# Altium PCB PCB1.PcbDoc (part 2 of 2)
Units mm, origin at the board's own origin, x right, y up, seen from the top; angles counter-clockwise.
Board outline 100 x 70 mm, 4 copper layers (Top Layer, Int1 (GND), Int2 (PWR), Bottom Layer), stack 1.334 mm thick; 109 components, 77 nets, 370 pads, 170 vias.
Unrouted connection lines stored in the file: 2.
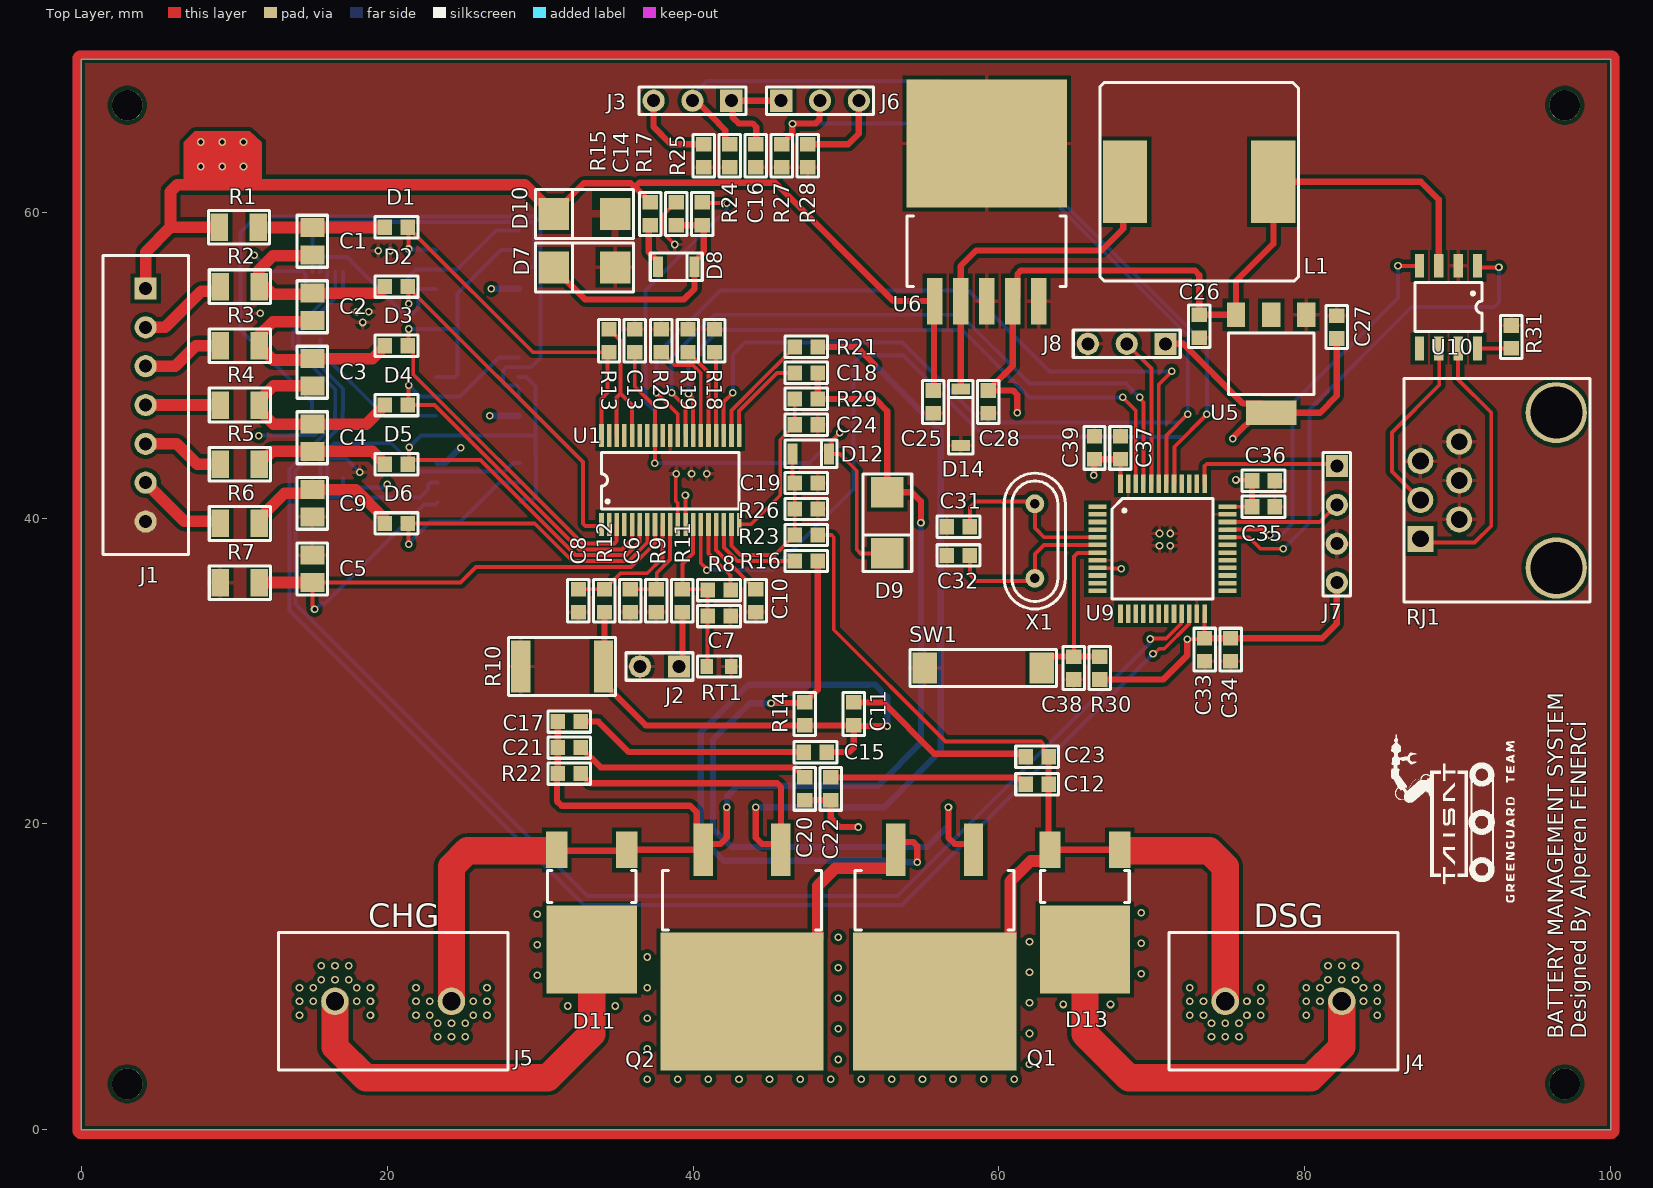
[diagram p0: Top Layer view]

## Via types
v1: diameter 0.5/0.5 (per signal layer), hole 0.3, Top Layer to Bottom Layer, 170 vias

## Nets (pads, with @x,y where several pads share a name; then routed paths per layer and width w, separated by ;. In a path a pad name is that pad's centre, name@x,y a point inside that pad or via, vN(x,y) a via of type N, cw(c..) or ccw(c..) an arc to the next point about the centre after c; other vN are vias at no path point) (continued)
CAN_L: (continued)
  Top Layer w0.254: RJ1.2 85.7,43.05 85.7,45.6 88.793,48.693 88.793,51.072 U10.6
CAN_RX: U9.32 U10.1 | length 32.8
  Top Layer w0.254: U9.32 76.35,38.75 77.1,38 v1(78.6,38) ; U10.1 91.405,56.4 v1(92.7,56.4)
  Bottom Layer w0.254: v1(78.6,38) 80.3,39.7 80.3,47.1 87,53.8 92.4,53.8 92.7,54.1 v1(92.7,56.4)
CAN_TX: U9.33 U10.4 | length 25.8
  Top Layer w0.254: U9.33 77.283,39.25 77.633,38.9 v1(77.7,38.9) ; v1(86.1,56.5) U10.4
  Bottom Layer w0.254: v1(77.7,38.9) 78.461,38.9 79.2,39.639 79.2,47.5 86.1,54.4 v1(86.1,56.5)
CCAP: C18.1 U1.20 | length 6.3
  Top Layer w0.254: U1.20@43,45.4 43,47 45.5,49.5 C18.1
CELL1: J1.6 R6.1 | length 6
  Top Layer w0.762: J1.6 6.72,39.8 8.938,39.8 R6.1
CELL2: J1.5 R5.1 | length 5.4
  Top Layer w0.762: J1.5 6.24,44.86 7.573,43.527 R5.1
CELL3: J1.4 R4.1 | length 4.9
  Top Layer w0.762: J1.4 R4.1
CELL4: J1.3 R3.1 | length 5.4
  Top Layer w0.762: J1.3 6.14,49.94 7.473,51.273 R3.1
CELL5: J1.2 R2.1 | length 6.1
  Top Layer w0.762: J1.2 5.48,52.48 7.832,54.832 8.891,54.832 9.085,55.026 R2.1
CELL6: C20.1 C22.1 C25.1 D10.1 D11.2 D13.2 J1.1 J4.2 J5.1 R1.1 R15.2 U2.8 U3.8 U4.8 U6.1 | length 137.9
  Top Layer w0.406: D10.1 30.9,59.95 32.85,61.9 35.925,61.9 36.242,61.583 ; R15.2 36.255,61.595 36.255,61.694 36.493,61.932 45.368,61.932 53.105,54.195 U6.1 55.748,54.147 55.748,48.398 C25.1 ; C20.1 C22.1 49,20.4 49.6,19.8 v1(50.8,19.8)
  Top Layer w0.762: J1.1 4.2,57.4 5.82,59.02 ; R1.1 5.82,59.02 ; D10.1@30.9,59.95 30.281,60.569 30.231,60.569 29,61.8 6.266,61.8 5.82,61.354 5.82,59.02
  Top Layer w1.778: J5.1 16.584,8.396 16.584,5.416 18.6,3.4 30.5,3.4 33.375,6.275 D11.2 ; D13.2 65.625,6.275 68.5,3.4 80.4,3.4 82.416,5.416 82.416,8.396 J4.2
  Bottom Layer w0.406: U4.8 23.775,43.605 24.752,44.582 24.782,44.582 v1(24.8,44.6) ; v1(26.7,46.7) 26.703,46.697 28.597,46.697 U3.8 ; v1(26.8,55) 26.802,54.997 28.597,54.997 U2.8
  other v1: 7.8,63 9.2,63 10.6,63 7.8,64.6 9.2,64.6 10.6,64.6
CHG: R21.2 U1.21 | length 7.5
  Top Layer w0.254: U1.21@42.5,45.4 42.5,47.039 45.342,49.881 45.356,49.881 46.65,51.175 R21.2
CHG_RAIL: C17.1 C18.2 C21.2 D9.2 D11.1 D11.3 J5.2 Q2.2 R22.1 R29.1 | length 91.7
  Top Layer w0.406: D11.3 31.15,18.255 35.6,18.255 D11.1 Q2.2 ; C17.1 C21.2 R22.1 31.1,23.25 31.1,21.5 31.4,21.2 39.8,21.2 40.235,20.765 40.235,18.74 Q2.2 ; v1(42.2,21.1) 42.2,19.1 41.8,18.7 41.046,18.7 Q2.2 ; C18.2 R29.1 51.9,47.8 52.7,47 D9.2 54.3,41.7 54.9,41.1 v1(54.9,39.7)
  Top Layer w1.778: J5.2 24.2,17.213 25.242,18.255 D11.3@30.901,18.255
  Bottom Layer w0.406: v1(42.2,21.1) 42.218,21.118 42.218,21.818 42.9,22.5 52.1,22.5 54.9,25.3 v1(54.9,39.7)
CHGST: J3.2 R24.2 U1.14 U9.41 | length 104.8
  Top Layer w0.254: U1.14@40.5,39.6 40.5,37.067 40.9,36.667 v1(40.9,36.6) ; U9.41 71.473,42.273 71.473,44.673 v1(73.6,46.8)
  Top Layer w0.406: J3.2 40.2,67.3 41.682,65.818 ; 41.7,65.8 41.7,65.775 42.103,65.371 42.103,64.722 42.375,64.45 R24.2
  Bottom Layer w0.254: J3.2 39.96,67.624 40.548,68.212 40.548,68.248 40.9,68.6 56.228,68.6 73.6,51.228 v1(73.6,46.8) 73.6,46.776 72.124,45.3 59.1,45.3 53.769,50.631 50.98,50.631 50.5,50.151 50.5,41.9 45.2,36.6 v1(40.9,36.6)
CPCKN: C24.1 R29.2 U1.19 | length 10.2
  Top Layer w0.254: U1.19@43,39.6 43.8,39.6 45.7,41.5 45.7,45.125 46.65,46.075 C24.1 R29.2
DCAP: C10.1 U1.16 | length 5.3
  Top Layer w0.254: U1.16@41.5,39.6 41.5,37.925 44.075,35.35 C10.1
DPCKN: C19.1 D12.2 R23.2 R26.2 U1.18 | length 11.7
  Top Layer w0.254: U1.18@42.5,39.6 42.5,38.2 43.1,37.6 45.35,37.6 46.277,38.527 46.302,38.527 46.65,38.875 R23.2 R26.2 C19.1 46.5,42.45 D12.2
DSG: R16.2 U1.17 | length 6.5
  Top Layer w0.254: U1.17@42,39.6 42.023,39.577 42.023,38.077 42.9,37.2 R16.2
DSG_RAIL: C12.1 C23.2 D13.1 D13.3 J4.1 Q1.3 R23.1 | length 65.7
  Top Layer w0.254: R23.1 49.051,38.9 49.2,38.751 49.2,32.7 56.5,25.4 62.753,25.4 62.902,25.251 62.902,24.748 C12.1
  Top Layer w0.406: C12.1 C23.2 63.25,18.404 D13.3 D13.1 D13.1@67.85,18.255
  Top Layer w0.762: Q1.3 56.626,8.4 60.753,12.527 60.753,16.253 62.081,17.581 63.021,17.581 63.34,17.9 D13.3
  Top Layer w1.778: D13.1@68.099,18.255 73.758,18.255 74.8,17.213 J4.1
GND: C5.2 C6.2 C7.2 C8.2 C9.2 C10.2 C13.2 C14.2 C16.2 C19.2 C24.2 C25.2 C26.2 C27.2 C28.2 C29.2 C30.2 C31.2 C32.2 C33.2 C34.2 C35.2 C36.2 C37.2 C38.2 C39.2 D7.2 D10.2 D14.2 J1.7 J2.2 J7.3 J8.3 R7.1 R9.1 R10.1 R18.1 R19.1 R20.1 R24.1 R25.1 R26.1 R27.1 R28.1 R31.1 RJ1.3 RJ1.4 RJ1.5 RJ1.6 RT1.2 SW1.1 U1.11 U1.29 U2.4 U3.4 U4.4 U5.1 U6.3 U6.5 U7.3 U8.1 U8.3 U9.8 U9.23 U9.35 U9.47 U10.2 | length 10.5
  Top Layer w0.254: v1(38.8,57.9) 38,58.7 38,59.775 38.875,60.65 C14.2 ; v1(38.9,42.9) 38.869,42.869 38.869,41.131 39,41 U1.11@39,39.6
  Bottom Layer w0.254: U7.3 16.1,43.7 16.3,43.9 17.3,43.9 v1(18.2,43)
  other v1: 70.5,38.2 71.2,38.2 70.5,39 71.2,39 39.9,42.9 40.9,42.9 18.4,52.8 11.7,53.4 18,53.5 18.8,53.5 19.4,57.5 20.2,57.5
HIGH_DSG_RAIL: C11.1 C15.1 Q1.2 Q2.3 R10.2 R12.1 R14.1 | length 84.7
  Top Layer w0.406: R12.1 34.2,30.37 R10.2 34.13,29.225 36.905,26.45 R14.1 C11.1 ; C15.1 50.2,24.7 50.5,25 C11.1 ; v1(52.7,26.4) 52.682,26.418 50.532,26.418 C11.1 ; Q1.2 53.26,18.353 Q1.2@53.685,18.778 ; Q1.2@53.685,18.822 54.4,18.822 54.662,18.559 54.662,17.5 v1(54.665,17.497)
  Top Layer w0.762: Q2.3 44.026,8.4 48.153,12.527 48.153,15.953 49.3,17.1 53.013,17.1 53.26,17.347 Q1.2
  Bottom Layer w0.406: v1(52.7,26.4) 52.7,28.3 51.868,29.132 51.532,29.132 51.5,29.1 43.6,29.1 40.5,26 40.5,19.1 42,17.6 53.603,17.6 53.706,17.497 v1(54.665,17.497)
NetC1_1: C1.1 D1.2 R1.2 | length 8.3
  Top Layer w0.762: R1.2 11.585,59.01 15.09,59.01 C1.1 15.11,59.01 19.84,59.01 D1.2
NetC1_2: C1.2 C2.1 D2.2 R2.2 | length 13.3
  Top Layer w0.762: C2.1@15.065,54.648 12.527,54.648 11.6,55.575 11.6,56.225 12.527,57.152 C1.2@15.065,57.152 ; C2.1 19.419,54.716 19.731,55.028 19.756,55.028 19.85,55.122 D2.2
NetC2_2: C2.2 C3.1 D3.2 R3.2 | length 13.5
  Top Layer w0.762: C3.1@15.065,50.348 12.527,50.348 11.6,51.275 11.6,51.925 12.527,52.852 C2.2@15.065,52.852 ; C3.1 19.034,50.432 19.85,51.248 D3.2 D3.2@19.85,51.298
NetC3_2: C3.2 C4.1 D4.2 R4.2 | length 13.6
  Top Layer w0.762: C3.2 12.562,48.652 11.635,47.725 R4.2 11.635,47.075 12.562,46.148 C4.1 18.623,46.148 19.85,47.375 D4.2
NetC4_2: C4.2 D5.2 R5.2 | length 9.1
  Top Layer w0.762: R5.2 11.635,43.852 11.829,44.046 12.154,44.046 12.476,44.368 C4.2 19.034,44.368 19.85,43.552 D5.2
NetC9_1: C9.1 D6.2 R6.2 | length 10.4
  Top Layer w0.762: R6.2 11.635,39.978 13.282,41.625 14.861,41.625 C9.1 17.936,41.864 19.756,40.044 19.756,39.747 D6.2
NetC11_2: C11.2 C12.2 | length 12.7
  Top Layer w0.406: C11.2 52.423,27.95 55.773,24.6 61.55,24.6 C12.2
NetC14_1: C14.1 D7.1 D8.1 R17.2 | length 16.5
  Top Layer w0.406: D7.1 30.9,56.35 32.95,54.3 39.4,54.3 40.1,55 40.1,56.8 40.7,57.4 40.7,59.05 R17.2 C14.1
NetC15_2: C15.2 C17.2 | length 15.4
  Top Layer w0.406: C17.2 33.8,26.7 35.8,24.7 C15.2
NetC20_2: C20.2 C21.1 | length 15.5
  Top Layer w0.406: C21.1 33.95,23.7 46.65,23.7 47.003,23.347 47.003,23.322 47.275,23.05 C20.2
NetC22_2: C22.2 C23.1 | length 12.9
  Top Layer w0.406: C22.2@49.025,23.05 61.24,23.05 61.393,22.897 61.478,22.897 61.75,22.625 C23.1
NetD8_2: D8.2 R15.1 | length 2.5
  Top Layer w0.406: R15.1@37.1,59.05 37.1,57.4 D8.2@37.7,56.8
NetD14_1: D14.1 L1.1 U6.2 | length 22.8
  Top Layer w0.406: D14.1 D14.1 57.499,54.194 U6.2 57.498,56.498 58.5,57.5 66.7,57.5 68.128,58.928 68.128,61.878 L1.1
NetJ2_1: J2.1 R11.2 | length 3.6
  Top Layer w0.406: J2.1 39.3,30.53 R11.2
NetJ3_3: J3.3 R25.2 | length 5.5
  Top Layer w0.406: J3.3 37.42,65.58 38.55,64.45 R25.2
NetJ6_3: J6.3 R28.2 | length 5.8
  Top Layer w0.406: R28.2 50.15,64.45 50.84,65.14 J6.3
NetQ1_1: Q1.1 R14.2 R16.1 | length 43.4
  Top Layer w0.406: v1(45.1,27.9) 45.118,27.918 47.268,27.918 R14.2 47.325,27.95 48.15,28.775 R16.1 ; v1(56.7,21.1) 56.7,19.1 57.1,18.7 Q1.1@57.854,18.7
  Bottom Layer w0.406: v1(45.1,27.9) 43.7,27.9 41.3,25.5 41.3,19.7 42.5,18.5 55.3,18.5 56.7,19.9 v1(56.7,21.1)
NetQ2_1: Q2.1 R21.1 R22.2 | length 65.8
  Top Layer w0.406: R22.2 32.65,23.275 32.922,23.003 32.947,23.003 33.29,22.66 45.502,22.66 45.74,22.422 Q2.1 ; v1(44.1,21.1) 44.1,19.1 44.5,18.7 Q2.1@45.254,18.7 ; R21.1 50.7,51.2 51.9,50
  Bottom Layer w0.406: v1(44.1,21.1) 52.5,21.1 56.2,24.8 56.2,45.7 51.9,50
NetR13_2: R13.2 U1.34 U1.36 | length 10.4
  Top Layer w0.254: R13.2 34.525,52.35 35.254,51.621 35.254,48.154 ; U1.36@35,45.4 35,47.9 35.254,48.154 ; U1.34@36,45.4 36,47.408 35.254,48.154
NetR18_2: R18.2 U1.23 | length 5.5
  Top Layer w0.254: R18.2 41.5,50.75 U1.23@41.5,45.4
NetR19_2: R19.2 U1.24 | length 6
  Top Layer w0.254: R19.2 39.687,50.85 41,49.538 U1.24@41,45.4
NetR20_2: R20.2 U1.25 | length 7.2
  Top Layer w0.254: R20.2 37.95,50.85 38.8,50 39.999,50 40.5,49.499 U1.25@40.5,45.4
NetR31_2: R31.2 U10.8 | length 2.2
  Top Layer w0.254: U10.8 R31.2
NetU1_26: U1.26 U9.46 | length 42.1
  Top Layer w0.254: v1@39.7,48.2 v1(39.7,48.133) 40,47.833 U1.26@40,45.4 ; v1(68.1,47.9) 68.95,47.05 U9.46
  Bottom Layer w0.254: v1@39.7,48.2 39.7,50.3 41.7,52.3 57.6,52.3 62,47.9 v1(68.1,47.9)
NetU1_27: U1.27 U9.45 | length 45.2
  Top Layer w0.254: v1(38.6,48.2) 39.5,47.3 U1.27@39.5,45.4 ; v1(69.2,47.9) 69.2,47.833 69.45,47.583 U9.45
  Bottom Layer w0.254: v1(38.6,48.2) 38.6,50.5 41.4,53.3 57.5,53.3 62,48.8 68.3,48.8 v1(69.2,47.9)
NetU1_28: U1.28 U9.43 | length 51.2
  Top Layer w0.254: v1(37.6,48.2) 39,46.8 U1.28@39,45.4 ; U9.43 70.45,48.75 v1(71.3,49.6)
  Bottom Layer w0.254: v1(37.6,48.2) 37.6,50.7 41.8,54.9 58,54.9 63.3,49.6 v1(71.3,49.6)
NetU7_9: U7.9 U8.9 U9.22 | length 100.8
  Top Layer w0.254: v1(70.077,31.123) 70.143,31.123 70.482,31.462 70.81,31.462 72.427,33.079 72.427,33.727 U9.22
  Bottom Layer w0.254: U8.9 16.6,54.973 13.819,52.192 13.819,51.208 16.6,48.427 U7.9 16.577,46.977 16.577,46.204 13.6,43.227 13.6,33.969 32.869,14.7 53.654,14.7 v1(70.077,31.123)
NetU7_10: U7.10 U8.10 U9.21 | length 99.4
  Top Layer w0.254: v1(69.9,32.1) 69.931,32.131 70.94,32.131 71.927,33.118 71.927,33.277 71.95,33.3 U9.21
  Bottom Layer w0.254: U8.10 17.1,54.934 14.2,52.034 14.2,51.366 17.1,48.466 U7.10 17.077,46.977 17.077,46.165 14,43.088 14,34.4 33.1,15.3 53.361,15.3 69.853,31.792 69.853,32.053 v1(69.9,32.1)
OSC_IN: C31.1 U9.5 X1.1 | length 11.7
  Top Layer w0.254: C31.1 58.1,40.7 58.5,41.1 62.19,41.1 X1.1 62.35,39.35 62.95,38.75 U9.5
OSC_OUT: C32.1 U9.6 X1.2 | length 11.7
  Top Layer w0.254: C32.1 58.1,36.3 58.5,35.9 62.19,35.9 X1.2 62.35,37.65 62.95,38.25 U9.6
RESET: C38.1 R30.1 SW1.2 U9.7 | length 12.4
  Top Layer w0.254: C38.1 64.9,37.5 65.127,37.727 66.427,37.727 U9.7
  Top Layer w0.406: SW1.2 62.8,30.353 63.397,30.95 C38.1 R30.1
"SENSE +": C6.1 R9.2 U1.10 | length 6.3
  Top Layer w0.254: C6.1 R9.2 ; R9.2@37.625,35.35 37.625,36.425 38.5,37.3 U1.10@38.5,39.6
"SENSE -": C8.1 R12.2 U1.9 | length 8.6
  Top Layer w0.254: C8.1 R12.2 34.225,35.35 34.573,35.698 34.573,35.723 35.25,36.4 37,36.4 38,37.4 U1.9@38,39.6
SWCLK: J7.1 U9.37 | length 9.9
  Top Layer w0.254: U9.37 73.45,43.401 73.599,43.55 81.96,43.55 J7.1
SWDIO: J7.2 U9.34 | length 7.6
  Top Layer w0.254: U9.34 80.98,39.75 J7.2
TS: C7.1 R8.2 R11.1 RT1.1 U1.13 | length 11.2
  Top Layer w0.254: U1.13@40,39.6 40,37.699 39.3,36.999 R11.1 40.9,35.35 R8.2 C7.1 40.95,30.35 RT1.1
VC3: D1.1 R13.1 U1.38 U2.3 | length 25.4
  Top Layer w0.254: D1.1 21.4,58.97 D1.1@21.4,58.945 ; v1(21.4,57.6) D1.1@21.4,58.945 ; U1.38@34,45.4 34,47.8 34.4,48.2 34.4,50.75 R13.1 ; R13.1@34.475,50.85 29.52,50.85 21.723,58.647 21.698,58.647 D1.1@21.4,58.945
  Bottom Layer w0.254: v1(21.4,57.6) 21.432,57.567 23.168,57.567 U2.3
VC4: D2.1 U1.1 U2.2 U2.5 | length 32.9
  Top Layer w0.254: D2.1 21.4,55.097 v1(21.4,54.012) ; D2.1@21.4,55.072 32.8,43.672 32.8,39.649 32.949,39.5 33.977,39.5 34,39.523 U1.1@34,39.6
  Bottom Layer w0.254: v1(21.4,54.012) 21.4,55.8 21.865,56.265 U2.2 24.565,56.265 27.105,58.805 U2.5
VC5: D3.1 U1.3 U2.6 U3.3 | length 37.3
  Top Layer w0.254: v1(21.4,52.369) 21.4,51.323 D3.1 21.698,50.925 21.698,50.753 21.7,50.751 21.7,49.4 32.757,38.343 34.851,38.343 35,38.492 U1.3@35,39.6
  Bottom Layer w0.254: v1(21.4,52.369) 24.6,52.369 ; U3.3 24.451,49.235 24.6,49.384 24.6,52.369 ; U2.6 27.435,57.535 24.6,54.7 24.6,52.369
VC6: D4.1 U1.5 U3.2 U3.5 | length 29.7
  Top Layer w0.254: v1(21.4,48.7) 21.4,47.45 D4.1 23.1,47.4 32.538,37.962 35.362,37.962 36,38.6 U1.5@36,39.6
  Bottom Layer w0.254: v1(21.4,48.7) 22.135,47.965 U3.2 24.765,47.965 27.305,50.505 U3.5
VC7: D5.1 U1.6 U3.6 U4.3 | length 38.7
  Top Layer w0.254: D5.1 D5.1@21.4,43.577 ; v1(21.427,44.627) 21.427,43.604 D5.1@21.4,43.577 ; U1.6@36.5,39.6 36.5,38.439 35.642,37.581 32.319,37.581 26.1,43.8 21.623,43.8 D5.1@21.4,43.577
  Bottom Layer w0.254: v1(21.427,44.627) 22.2,45.4 29.7,45.4 ; U3.6 29.075,49.235 29.7,48.61 29.7,45.4 ; U4.3 28.873,41.238 29.551,41.238 29.729,41.416 29.729,44.01 29.7,44.039 29.7,45.4
VC8: D6.1 U1.7 U4.2 U4.5 | length 28.7
  Top Layer w0.254: v1(21.4,38.3) 21.4,39.603 D6.1 29.647,39.653 32.1,37.2 35.8,37.2 37,38.4 U1.7@37,39.6
  Bottom Layer w0.254: v1(21.4,38.3) 21.447,38.347 21.447,38.417 22.825,39.795 U4.5 24.795,39.795 27.335,42.335 U4.2
VC9: C5.1 R7.2 U1.8 U4.6 | length 40.9
  Top Layer w0.254: C5.1@15.09,35.79 C5.1@15.1,35.79 ; C5.1 C5.1@15.1,35.79 ; v1(15.246,34.046) 15.246,34.113 15.1,34.259 C5.1@15.1,35.79 ; U1.8@37.5,39.6 37.5,38.361 35.939,36.8 25.8,36.8 24.79,35.79 C5.1@15.1,35.79
  Top Layer w0.762: R7.2 11.645,35.79 C5.1@15.09,35.79
  Bottom Layer w0.254: v1(15.246,34.046) 15.313,34.046 15.699,34.432 15.932,34.432 22.392,40.892 23.127,40.892 U4.6
VREG: C16.1 J3.1 J6.1 U1.12 | length 9.2
  Top Layer w0.254: U1.12@39.5,39.6 v1(39.5,41.5)
  Top Layer w0.406: C16.1@44.125,64.45 44.125,65.58 43.887,65.818 42.982,65.818 42.597,66.203 42.597,67.203 J3.1 J6.1
VTSB: R8.1 U1.15 | length 4.9
  Top Layer w0.254: U1.15@41,39.6 41,37.7 42.3,36.4 42.45,36.25 R8.1
ZEDE: J6.2 R27.2 U1.22 U9.42 | length 84.7
  Top Layer w0.254: U1.22@42,45.4 42,47.6 v1(42.6,48.2) ; U9.42 70.95,45.4 v1(72.35,46.8)
  Top Layer w0.406: R27.2 45.825,64.45 46.097,64.722 46.097,64.747 46.482,65.132 46.482,65.782 v1(46.5,65.8) 46.518,65.818 48.025,65.818 48.263,66.056 48.263,67.263 J6.2
  Bottom Layer w0.254: v1(42.6,48.2) 42.6,50.7 43.4,51.5 53.7,51.5 58.931,46.269 71.819,46.269 v1(72.35,46.8) 72.35,51.939 58.489,65.8 v1(46.5,65.8)
pads on no net: RJ1. U1.2 U1.4 U1.30 U1.32 U1.33 U1.35 U1.37 U7.2 U7.7 U8.2 U8.5 U9.1 U9.2 U9.3 U9.4 U9.10 U9.11 U9.12 U9.13 U9.14 U9.15 U9.16 U9.17 U9.18 U9.19 U9.20 U9.25 U9.26 U9.27 U9.28 U9.29 U9.30 U9.31 U9.38 U9.39 U9.40 U10.5
copper on no net: | length 687.5
  Top Layer w0.6: -0.3,0 ccw(c0,0) 0,-0.3 ; -0.3,0 ccw(c0,0) 0,-0.3 ; -0.3,0 -0.3,70 ; -0.3,70 cw(c0,70) 0,70.3 ; -0.3,70 cw(c0,70) 0,70.3 ; 0,-0.3 100,-0.3 ; 0,70.3 100,70.3 ; 100,-0.3 ccw(c100,0) 100.3,0 ; 100,-0.3 ccw(c100,0) 100.3,0 ; 100,70.3 cw(c100,70) 100.3,70 ; 100,70.3 cw(c100,70) 100.3,70 ; 100.3,0 100.3,70
  Bottom Layer w0.6: -0.3,0 ccw(c0,0) 0,-0.3 ; -0.3,0 ccw(c0,0) 0,-0.3 ; -0.3,0 -0.3,70 ; -0.3,70 cw(c0,70) 0,70.3 ; -0.3,70 cw(c0,70) 0,70.3 ; 0,-0.3 100,-0.3 ; 0,70.3 100,70.3 ; 100,-0.3 ccw(c100,0) 100.3,0 ; 100,-0.3 ccw(c100,0) 100.3,0 ; 100,70.3 cw(c100,70) 100.3,70 ; 100,70.3 cw(c100,70) 100.3,70 ; 100.3,0 100.3,70
  other v1: 37,3.3 39,3.3 41,3.3 43,3.3 45,3.3 47,3.3 49,3.3 51,3.3 53,3.3 55,3.3 57,3.3 59,3.3 61,3.3 62,4.3 49.5,4.6 37,5.3 23.3,6.08 24.2,6.08 25.1,6.08 73.9,6.08 74.8,6.08 75.7,6.08 62,6.3 49.5,6.6 23.3,6.98 24.2,6.98 25.1,6.98 73.9,6.98 74.8,6.98 75.7,6.98 37,7.3 14.26,7.5 18.9,7.5 21.88,7.5 22.78,7.5 25.62,7.5 26.52,7.5 72.48,7.5 73.38,7.5 76.22,7.5 77.12,7.5 80.1,7.5 84.74,7.5 31.8,8.1 34.9,8.1 64.2,8.2 67.3,8.2 62,8.3 14.26,8.4 15.16,8.4 18,8.4 18.9,8.4 21.88,8.4 22.78,8.4 25.62,8.4 26.52,8.4 72.48,8.4 73.38,8.4 76.22,8.4 77.12,8.4 80.1,8.4 81,8.4 83.84,8.4 84.74,8.4 49.5,8.6 14.26,9.3 15.16,9.3 18,9.3 18.9,9.3 21.88,9.3 26.52,9.3 37,9.3 72.48,9.3 77.12,9.3 80.1,9.3 81,9.3 83.84,9.3 84.74,9.3 15.68,9.82 16.58,9.82 17.48,9.82 81.52,9.82 82.42,9.82 83.32,9.82 29.8,10.1 69.3,10.2 62,10.3 49.5,10.6 15.68,10.72 16.58,10.72 17.48,10.72 81.52,10.72 82.42,10.72 83.32,10.72 37,11.3 29.8,12.1 69.3,12.2 62,12.3 49.5,12.6 29.8,14.1 69.3,14.2

## Polygon pours and split planes (outlines as drawn)
GND on Bottom Layer "GND_L04_P001" (solid, remove dead copper, pour order 1): 0,70 100.3,70 100,69.7 100,0 0.3,0 0,-0.3
GND on Top Layer "GND_L01_P000" (solid, remove dead copper, pour order 0): -0.3,70 100,70 100,-0.3 0,-0.3
5V on Int2 (PWR) (split plane): 99.49,0.51 0.51,0.51 0.51,69.49 99.49,69.49
CELL6 on Int2 (PWR) (split plane): 29.098,56.258 29.098,30.3 29.106,30.261 29.128,30.228 36.928,22.428 36.961,22.406 37,22.398 70.158,22.398 85.454,7.102 80.242,7.102 73.572,13.772 73.539,13.794 73.5,13.802 25.8,13.802 25.761,13.794 25.728,13.772 18.858,6.902 15.342,6.902 13.802,8.442 13.802,8.458 23.472,18.128 23.494,18.161 23.502,18.2 23.502,50.2 23.494,50.239 23.472,50.272 22.072,51.672 22.039,51.694 22,51.702 18.242,51.702 5.594,64.35 6.942,65.698 19.658,65.698
3V3 on Int2 (PWR) (split plane): 76.398,44.1 76.398,30.202 65.002,30.202 65.002,44.058 69.672,48.728 69.694,48.761 69.702,48.8 69.702,52.798 76.398,52.798
VREG on Int2 (PWR) (split plane): 46.898,67.958 46.898,40.442 46.358,39.902 38.642,39.902 38.302,40.242 38.302,63.158 41.272,66.128 41.294,66.161 41.302,66.2 41.302,67.958 41.942,68.598 46.258,68.598
GND on Int1 (GND) (split plane): 99.49,0.51 0.51,0.51 0.51,69.49 99.49,69.49

## Other copper
Top Layer:
  region net CELL6: 11.8,62 11.8,64.6 11,65.3 7.4,65.3 6.7,64.6 6.7,62
Int2 (PWR) (plane layer: these items are gaps in the copper):
  lines w0.2: 5.45,64.35 18.2,51.6 22,51.6 23.4,50.2 23.4,18.2 13.7,8.5 13.7,8.4 15.3,6.8 18.2,6.8 18.9,6.8 25.8,13.7 73.5,13.7 80.2,7 85.7,7 70.2,22.5 37,22.5 29.2,30.3 29.2,56.3 19.7,65.8 6.9,65.8 5.45,64.35 ; 38.2,40.2 38.2,63.2 41.2,66.2 41.2,68 41.9,68.7 46.3,68.7 47,68 47,40.4 46.4,39.8 38.6,39.8 38.2,40.2 ; 64.9,30.1 64.9,44.1 69.6,48.8 69.6,52.9 76.5,52.9 76.5,44.1 76.5,30.1 64.9,30.1

## Silkscreen, mask and mechanical layers (free items; w line width, h text height)
Top Overlay:
  drawing of 24 lines, arcs and shapes, not listed
  text "CHG" at 18.754,13.254 h1.52
  text "DSG" at 76.664,13.254 h1.52
  text "BATTERY MANAGEMENT SYSTEM / Designed By Alperen FENERCİ" at 98.4,5.95 h1 r90
Bottom Overlay:
  drawing of 58 lines, arcs and shapes, not listed
  text "DANGER! HIGH VOLTAGE" at 34.346,18.329 h1.52